# Altium PCB PCB1.PcbDoc
Units mil, origin at the board's own origin, x right, y up, seen from the top; angles counter-clockwise.
Board outline 4547.44 x 2454.85 mil, 2 copper layers (Top Layer, Bottom Layer); 40 components, 33 nets, 183 pads, 228 vias.
Unrouted connection lines stored in the file: 2.
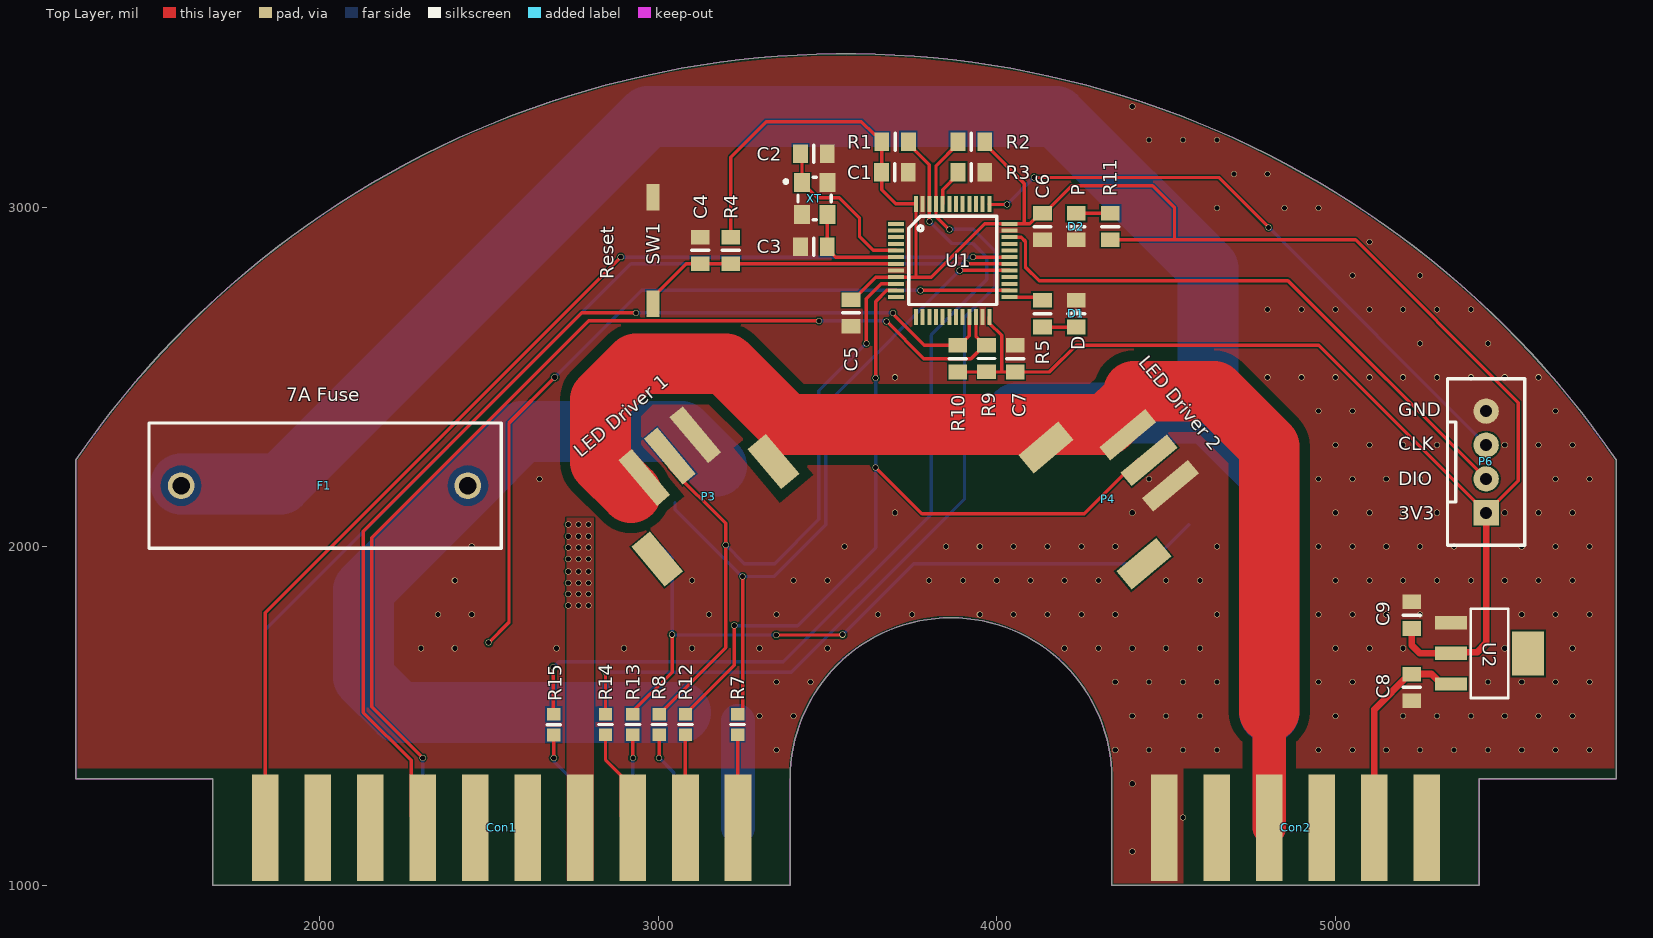
[diagram p0: Top Layer view]
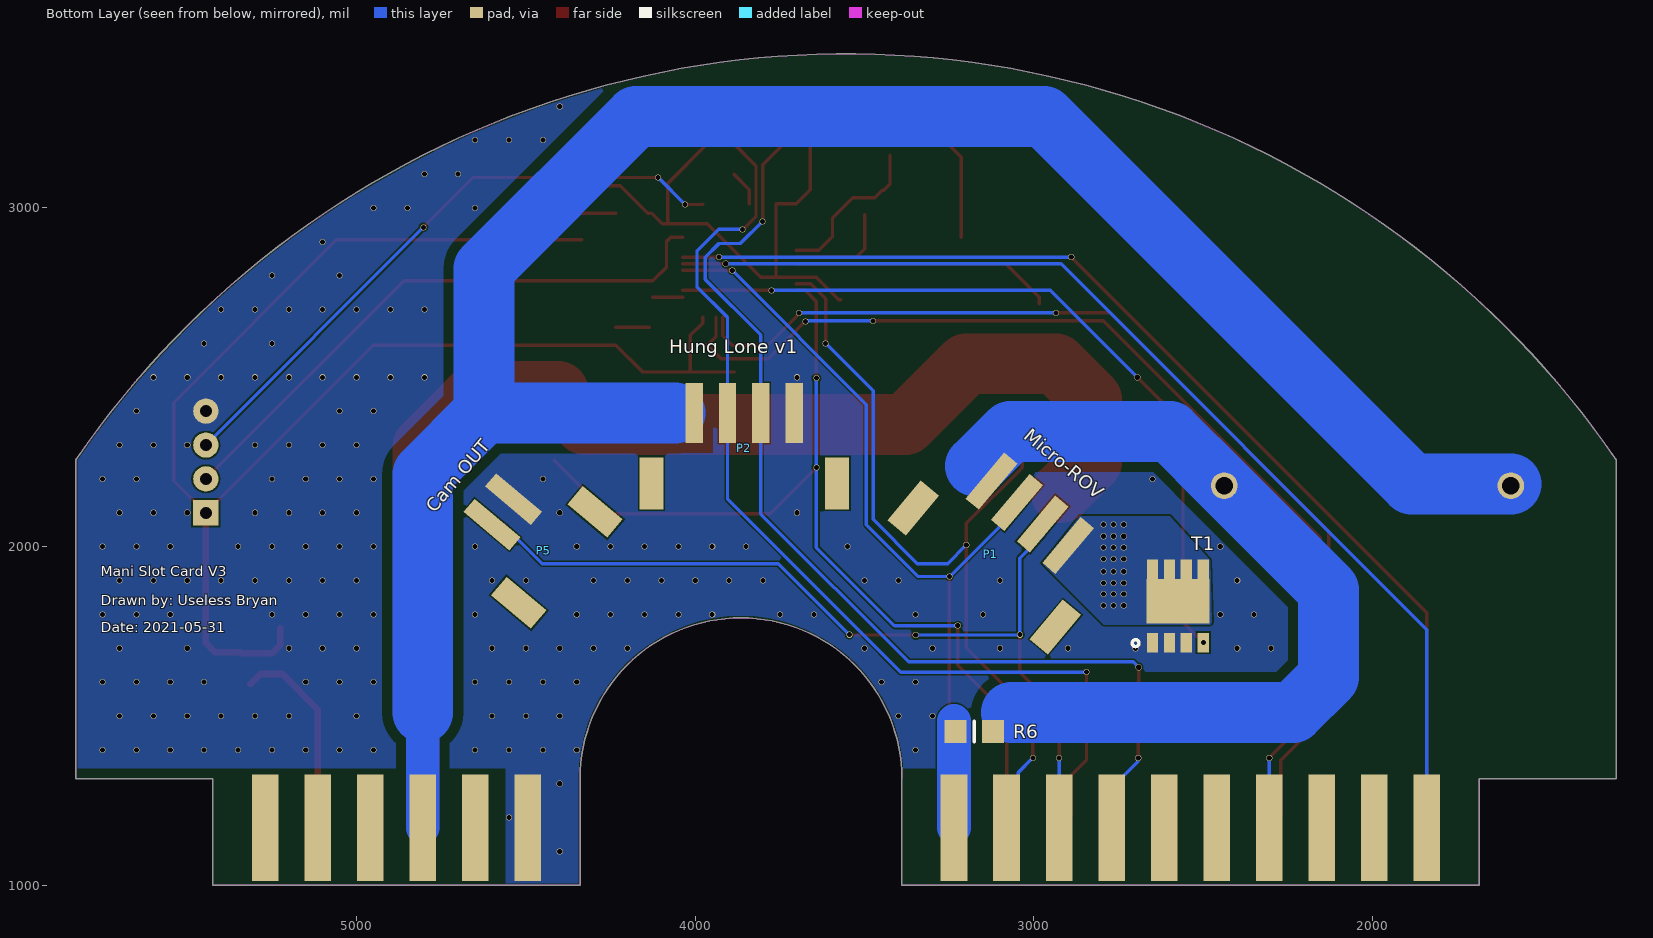
[diagram p1: Bottom Layer view, seen from below]
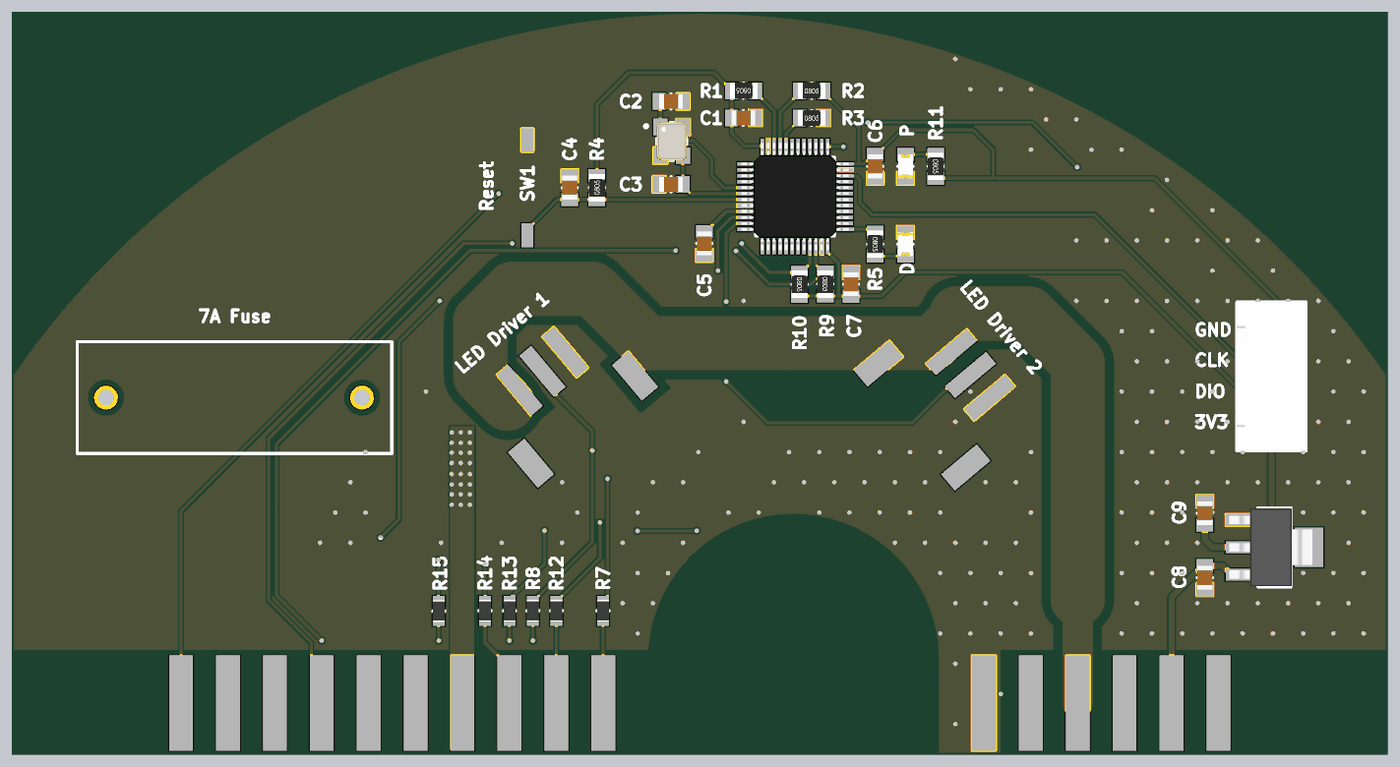
[diagram p2: 3D render of the assembled board from above, using the file's embedded part models]

## Layer stack, top to bottom
Top Solder: solder mask 0.4, Solder Resist, Dk 3.5
Top Layer: signal copper 1.4
Dielectric 1: dielectric 12.6, FR-4, Dk 4.8
Bottom Layer: signal copper 1.4
Bottom Solder: solder mask 0.4, Solder Resist, Dk 3.5

## Board outline
1281.3,1315 1281.3,2256.37 1281.27,2256.39 cw(c3555,699.09) 5828.71,2256.42 5828.7,2256.41 5828.7,1315 5425,1315 5425,1000 4340,1000 4340,1315 ccw(c3865,1315) 3865,1790 ccw(c3865,1315) 3390,1315 3390,1000 1685,1000 1685,1315

## Design rules (kind name [scope] priority, off if disabled: settings)
Clearance "Gold Finger" [InPadClass('Gold Finger')] p1: gap=5 ignorepadtopadclearanceinfootprint=FALSE except(10: SMDPad-Poly)
Clearance "Power Track" [InNetClass('Current')] p2: gap=20 ignorepadtopadclearanceinfootprint=TRUE except(10: Track-Track; 30: Track-SMDPad Track-Poly SMDPad-Poly Poly-Poly)
Clearance [All] p3: gap=5 ignorepadtopadclearanceinfootprint=FALSE except(10: SMDPad-Region)
PolygonConnect Current [InNetClass('Current')] p1: connectstyle=Direct reliefconductorwidth=10 reliefentries=4 polygonreliefangle="90 Angle" airgapwidth=10
PolygonConnect GND [InNetClass('GND')] p2: connectstyle=Direct reliefconductorwidth=10 reliefentries=4 polygonreliefangle="90 Angle" airgapwidth=10
PolygonConnect [All] p3: connectstyle=Relief reliefconductorwidth=10 reliefentries=4 polygonreliefangle="90 Angle" airgapwidth=10
RoutingVias [All] p1: holewidth=15 width=18 viastyle="Through Hole" minholewidth=14 minwidth=15 maxholewidth=28 maxwidth=50
SolderMaskExpansion [All] p1: expansion=4 istentingtop=FALSE
Width [All] p1: maxlimit=200 minlimit=10 preferedwidth=10
30 further rules are at their usual default settings.

## Classes and differential pairs
pad class "Gold Finger": Con2-2 Con2-4
net class GND: GND Micro_ROV_GND
net class Current: 12V Micro_ROV_12V

## Components (designator, comment, footprint, x,y, rotation, side; value= is the part's Value field where it differs from the comment)
C1 "100nF" C0805 3699.37,3105 r180 top locked
C2 "22pF" C0805 3460,3160 r180 top locked
C3 "22pF" C0805 3460,2885.79 r0 top locked
C4 "1uF" C0805 3125,2874.53 r270 top
C5 "100nF" C0805 3570,2690 r90 top locked
C6 "100nF" C0805 4135,2945 r90 top locked
C7 "100nF" C0805 4055,2555 r270 top locked
C8 "100nF" C0805 5225,1584.37 r90 top
C9 "100nF" C0805 5225,1797.64 r270 top
Con1 "2x10pin" 2x10pin 2538.03,1170 r0 top locked
Con2 "2x6pin" 2x6pin 4882.2,1170 r180 top locked
D1 "LED" LED-0805 4235,2687.68 r90 top locked
D2 "LED" LED-0805 4235,2945 r270 top locked
F1 "7A Fuse" FUSE-BLXA 2020,2179.96 r0 top
P1 "Micro-ROV" XH2.54-4PIN_SMD 3012.3,2098.37 r220 bottom
P2 "Hung Lone v1" XH2.54-4PIN_SMD 3855.47,2395 r180 bottom
P3 "LED Driver 1" XH2.54-3PIN_SMD 3035,2267.13 r40 top
P4 "LED Driver 2" XH2.54-3PIN_SMD 4450,2255 r310 top
P5 "Cam OUT" XH2.54-2PIN_SMD 4568.37,2102.7 r130 bottom
P6 "ST-Link" XH2.54-4PIN 5445,2250 r90 top
R1 "4.7k" R0805 3700,3195 r180 top locked
R2 "4.7k" R0805 3925,3195 r0 top locked
R3 "1k" R0805 3925,3105 r0 top locked
R4 "10k" R0805 3215,2874.53 r90 top
R5 "1k" R0805 4135,2687.68 r270 top locked
R6 "0" R1206 3176.23,1454.49 r180 bottom
R7 "0" R0603 3235,1475 r90 top
R8 "0" R0603 3003.39,1475 r90 top
R9 "4.7k" R0805 3970,2555.63 r270 top locked
R10 "4.7k" R0805 3885,2555 r270 top locked
R11 "1k" R0805 4335,2945 r270 top locked
R12 "0" R0603 3080.94,1475 r90 top
R13 "0" R0603 2925.83,1475 r90 top
R14 "0" R0603 2845,1475 r90 top
R15 "0" R0603 2692.23,1474.21 r90 top
SW1 "SW-PB" SWITCH-2PIN 2985,2874.53 r270 top
T1 "NMOS 2R6" TPH2R608NH 2575,1825 r180 bottom
U1 "STM32F103C8T6" LQFP48 3870,2845 r270 top locked
U2 "AMS1117" SOT-223 5455,1685 r0 top
XT "8MHz" 3225-P 3462.4,3027.76 r270 top locked

## Footprints (in the part's own frame and the unit in brackets; to place one, negate y for a bottom-side part, rotate by r counter-clockwise, add the part's x,y. Pads: shape width x height; smd on the part's side, far side on the other; paste and mask are expansions set on the pad)
2x6pin [mm]
  rect 2x8 smd: 1(-9.85,0) 2(-5.91,0) 3(-1.97,0) 4(1.97,0) 5(5.91,0) 6(9.85,0)
  rect 2x8 smd far side: 1(-9.85,0) 2(-5.91,0) 3(-1.97,0) 4(1.97,0) 5(5.91,0) 6(9.85,0)
2x10pin [mm]
  rect 2x8 smd far side: 1(17.73,0) 3(13.79,0) 5(9.85,0) 7(5.91,0) 9(1.97,0) 11(-1.97,0) 13(-5.91,0) 15(-9.85,0) 17(-13.79,0) 19(-17.73,0)
  rect 2x8 smd: 2(17.73,0) 4(13.79,0) 6(9.85,0) 8(5.91,0) 10(1.97,0) 12(-1.97,0) 14(-5.91,0) 16(-9.85,0) 18(-13.79,0) 20(-17.73,0)
3225-P [mm]
  rect 1.4x1.2 smd: 1(-1.2,-0.95) 2(-1.2,0.95) 2(1.2,-0.95) 3(1.2,0.95)
  silkscreen extent -1.6,-2.29 1.6,1.25, body extent -1.6,-1.25 1.6,1.25, height 0.61
C0805 [mm]
  rect 1.1x1.4 smd: 1(-1,0) 2(1,0)
  silkscreen extent 0,-0.64 0,0.64, body extent -1,-0.62 1,0.63, height 0.6
FUSE-BLXA [mm]
  round 2 hole 1.3: 1(-10.871,0) 2(10.629,0)
  silkscreen extent -13.28,-4.7 13.13,4.7
LED-0805 [mm]
  rect 1.1x1.4 smd: 1(-1,0) 2(1,0)
  silkscreen extent 0,-0.64 0.23,0.64, body extent -1,-0.62 1,0.63, height 0.81
LQFP48 [mm]
  rect 0.3x1.2 smd: 1(-2.75,-4.25) 2(-2.25,-4.25) 3(-1.75,-4.25) 4(-1.25,-4.25) 5(-0.75,-4.25) 6(-0.25,-4.25) 7(0.25,-4.25) 8(0.75,-4.25) 9(1.25,-4.25) 10(1.75,-4.25) 11(2.25,-4.25) 12(2.75,-4.25) 25(2.75,4.25) 26(2.25,4.25) 27(1.75,4.25) 28(1.25,4.25) 29(0.75,4.25) 30(0.25,4.25) 31(-0.25,4.25) 32(-0.75,4.25) 33(-1.25,4.25) 34(-1.75,4.25) 35(-2.25,4.25) 36(-2.75,4.25)
  rect 1.2x0.3 smd: 13(4.25,-2.75) 14(4.25,-2.25) 15(4.25,-1.75) 16(4.25,-1.25) 17(4.25,-0.75) 18(4.25,-0.25) 19(4.25,0.25) 20(4.25,0.75) 21(4.25,1.25) 22(4.25,1.75) 23(4.25,2.25) 24(4.25,2.75) 37(-4.25,2.75) 38(-4.25,2.25) 39(-4.25,1.75) 40(-4.25,1.25) 41(-4.25,0.75) 42(-4.25,0.25) 43(-4.25,-0.25) 44(-4.25,-0.75) 45(-4.25,-1.25) 46(-4.25,-1.75) 47(-4.25,-2.25) 48(-4.25,-2.75)
  silkscreen extent -3.3,-3.3 3.3,3.3, body extent -4.5,-4.5 4.5,4.5, height 1.47
R0603 [mm] "Chip Resistor, 2-Leads, Body 1.60x0.80mm, IPC Medium Density"
  rect 0.95x1 smd: 1(-0.775,0) 2(0.775,0)
  silkscreen extent 0,-0.51 0,0.51, body extent -0.9,-0.5 0.9,0.5, height 0.55
R0805 [mm]
  rect 1.1x1.4 smd: 1(-1,0) 2(1,0)
  silkscreen extent 0,-0.64 0,0.64, body extent -1.15,-0.67 1.15,0.68, height 0.76
R1206 [mil]
  rect 65x68 smd: 1(-55,0) 2(55,0)
  silkscreen extent 0,-30 0,30, body extent -63,-31 63,31, height 24
SOT-223 [mm]
  rect 2.4x1 smd: 1(-2.9,2.3) 2(-2.9,0) 3(-2.9,-2.3)
  rect 2.4x3.3 smd: 4(2.9,0)
  silkscreen extent -1.4,-3.35 1.4,3.35, body extent -3.81,-3.25 3.19,3.25, height 1.59
SWITCH-2PIN [mm]
  rect 2x1 smd: 1(-4,0) 2(4,0)
TPH2R608NH [mm]
  rect 0.85x1.45 smd: 1(-1.905,2.75) 1(-0.635,2.75) 1(0.635,2.75) 1(1.905,2.75) 2(1.905,-2.75) 3(-1.905,-2.75) 3(-0.635,-2.75) 3(0.635,-2.75)
  rect 4.7x3.35 smd: 1(0,0.35)
  silkscreen extent -3.43,-3.05 -2.92,-2.54, body extent -2.45,-3 2.45,3, height 1
XH2.54-2PIN_SMD [mm]
  rect 1.3x4.5 smd: 1(-1.25,0) 2(1.25,0)
  rect 1.8x3.9 smd: 3(-4.45,-5.3) 3(4.45,-5.3)
XH2.54-3PIN_SMD [mm]
  rect 1.3x4.5 smd: 1(-2.5,0) 2(0,0) 3(2.5,0)
  rect 1.8x3.9 smd: 4(-5.7,-5.3) 4(5.7,-5.3)
XH2.54-4PIN [mm]
  rect 1.9x1.9 hole 0.9: 1(-3.81,0)
  round 1.9 hole 0.9: 2(-1.27,0) 3(1.27,0) 4(3.81,0)
  silkscreen extent -6.25,-2.9 6.25,2.9, body extent -6.25,-2.9 6.25,2.9, height 7
XH2.54-4PIN_SMD [mm]
  rect 1.3x4.5 smd: 1(-3.75,0) 2(-1.25,0) 3(1.25,0) 4(3.75,0)
  rect 1.8x3.9 smd: 5(-6.95,-5.3) 5(6.95,-5.3)

## Part data
C1 C2 C3 C4 C5 C6 C7 C8 C9: library part Cap
F1: library part Fuse
P1 P2 P6: library part 4Pin
P3 P4: library part 3Pin
P5: library part 2Pin
R1 R2 R4: library part Resistor, "pull-up resistor"
R3 R5 R6 R7 R8 R9 R10 R11 R12 R13 R14 R15: library part Resistor
T1: library part MOSFET-N
XT: library part "Passive Crystal"

## Via types
v1: diameter 18, hole 15, Top Layer to Bottom Layer, tented both sides, 228 vias

## Nets (pads, with @x,y where several pads share a name; then routed paths per layer and width w, separated by ;. In a path a pad name is that pad's centre, name@x,y a point inside that pad or via, vN(x,y) a via of type N, cw(c..) or ccw(c..) an arc to the next point about the centre after c; other vN are vias at no path point)
3V3: C1.2 C5.2 C6.2 C7.2 C9.2 P6.1 R1.2 R2.2 R4.2 R9.2 R10.2 R11.2 U1.9 U1.24 U1.36 U1.48 U2.2 | length 7142
  Top Layer w10: R4.2 3215,3150 3320,3255 3600.63,3255 3638.07,3217.56 3643.98,3217.56 R1.2@3660.63,3200.91 ; C5.2 3575.91,2729.37 3642.32,2795.79 U1.9 3761.73,2795.79 ; R1.2 3660.63,3105 3660.63,3053.94 3702.24,3012.32 U1.48 3761.73,2795.79 ; R10.2 3970,2515.63 4014.41,2515.63 ; R2.2 3964.37,3189.09 4081.29,3072.18 4081.29,2953.27 ; U1.24 3978.27,2659.96 4014.41,2623.82 4014.41,2515.63 ; C6.2@4129.09,2984.37 4097.99,2953.27 4081.29,2953.27 ; C6.2 4140.91,2984.37 4221.54,3065 4460,3065 4525,3000 4525,2905.63 ; R11.2 4525,2905.63 ; 3761.73,2795.79 3806.89,2795.79 3964.37,2953.27 U1.36 4081.29,2953.27 ; 4014.41,2515.63 C7.2 4155.63,2515.63 4234.37,2594.37 4950.63,2594.37 P6.1 5540,2195 5540,2425 5059.37,2905.63 4525,2905.63
  Top Layer w20: C9.2 5225,1710 5250,1685 U2.2 5343.9,1688.07 5418.07,1688.07 5445,1715 P6.1
5V: C8.2 Con2.2 U2.3 | length 603.2
  Top Layer w20: Con2.2@5114.88,1170 5114.88,1519.53 5219.09,1623.74 C8.2 5283.98,1623.74 U2.3@5313.27,1594.45
12V: Con2.4 F1.1 P2.1 P3.1 P3.4@3341.03,2251.54 P4.1 P4.4@4145.91,2292.78 | length 9589
  Top Layer w100: Con2.4@4804.65,1170 4804.65,1513.19
  Top Layer w180: 2920,2160 2829.6,2250.4 2829.6,2434.56 2935.04,2540 3200,2540 3380,2360 4325,2360 4405,2440 ; 4405,2458.83 4641.17,2458.83 4804.65,2295.35 4804.65,1513.19
  Bottom Layer w100: Con2.4@4804.65,1170 4804.65,1509.65
  Bottom Layer w180: F1.1@1592,2185 1885,2185 2970,3270 4175,3270 4624.29,2820.71 4624.29,2395 ; 4060,2395 4624.29,2395 ; 4804.65,1509.65 4804.65,2214.65 4624.29,2395
Cam: P1.3 P5.1 R13.2 | length 2268.1
  Top Layer w10: R13.2@2916.89,1504.72 3041.73,1629.56 v1(3041.73,1740) ; v1(3348.94,1738.99) 3543.99,1738.99 v1(3545,1740)
  Bottom Layer w10: P1.3@2974.6,2033.14 3041.73,1966.02 v1(3041.73,1740) 3042.74,1738.99 v1(3348.94,1738.99) ; v1(3545,1740) 3755,1950 4451.41,1950 P5.1@4566.41,2065
GND: C1.1 C2.1 C3.1 C4.1 C5.1 C6.1 C7.1 C8.1 C9.1 Con2.6 D1.2 D2.2 P2.4 P3.3 P4.3 P5.2 P6.4 R3.2 SW1.1 T1.3 U1.8 U1.23 U1.35 U1.47 U2.1 XT.2
  other v1: 4400,1100 4550,1200 4400,1300 3350,1400 4350,1400 4450,1400 4550,1400 4650,1400 4950,1400 5050,1400 5150,1400 5250,1400 5350,1400 5450,1400 5550,1400 5650,1400 5750,1400 3300,1500 3400,1500 4400,1500 4500,1500 4600,1500 5000,1500 5200,1500 5300,1500 5400,1500 5500,1500 5600,1500 5700,1500 3350,1600 3450,1600 4350,1600 4450,1600 4550,1600 4650,1600 4950,1600 5050,1600 5150,1600 5450,1600 5550,1600 5650,1600 5750,1600 2300,1700 2400,1700 2700,1700 2900,1700 3100,1700 3300,1700 3500,1700 4200,1700 4300,1700 4400,1700 4500,1700 4600,1700 5000,1700 5100,1700 5200,1700 5500,1700 5700,1700 2350,1800 2450,1800 3150,1800 3350,1800 3650,1800 3750,1800 3950,1800 4050,1800 4150,1800 4250,1800 4350,1800 4650,1800 4950,1800 5050,1800 5150,1800 5250,1800 5550,1800 5650,1800 5750,1800 2400,1900 3100,1900 3400,1900 3500,1900 3800,1900 3900,1900 4000,1900 4100,1900 4200,1900 4300,1900 4500,1900 4600,1900 5000,1900 5100,1900 5200,1900 5300,1900 5400,1900 5500,1900 5600,1900 5700,1900 2450,2000 3550,2000 3850,2000 3950,2000 4050,2000 4150,2000 4250,2000 4350,2000 4650,2000 4950,2000 5050,2000 5150,2000 5250,2000 5350,2000 5550,2000 5650,2000 5750,2000 3700,2100 4400,2100 5000,2100 5100,2100 5200,2100 5300,2100 5500,2100 5600,2100 5700,2100 2650,2200 4450,2200 4950,2200 5050,2200 5150,2200 5250,2200 5650,2200 5750,2200 5000,2300 5100,2300 5200,2300 5300,2300 5500,2300 5600,2300 5700,2300 4950,2400 5050,2400 5650,2400 3700,2500 4800,2500 4900,2500 5000,2500 5100,2500 5200,2500 5300,2500 5400,2500 5500,2500 5600,2500 5250,2600 5450,2600 4800,2700 4900,2700 5000,2700 5100,2700 5200,2700 5300,2700 5400,2700 5050,2800 5250,2800 5100,2900 4650,3000 4850,3000 4950,3000 4700,3100 4800,3100 4450,3200 4550,3200 4650,3200 4400,3300
GPIO: T1.2 U1.26 | length 2312.6
  Top Layer w10: v1(2500,1716.73) 2560,1776.73 2560,2365.02 v1(2695,2500.02) ; v1(3775,2756.42) U1.26
  Bottom Layer w10: v1(2695,2500.02) 2951.4,2756.42 3095,2756.42 v1(3775,2756.42)
I2C1_SCL: P2.2 R2.1 R14.2 U1.45 | length 2622.7
  Top Layer w10: R14.2 v1(2845,1629.56) ; v1(3860.16,2936.9) 3858.06,2936.9 3820.79,2974.17 U1.45 3820.79,3124.25 R2.1@3885.63,3189.09
  Bottom Layer w10: v1(2845,1629.56) 3393.85,1629.56 3904.69,2140.4 P2.2 3904.69,2676.57 3995,2766.89 3995,2872.06 3930.16,2936.9 v1(3860.16,2936.9)
I2C1_SDA: P2.3 R1.1 R15.2 U1.46 | length 2733.8
  Top Layer w10: R15.2@2690.76,1506.19 v1(2690.76,1643.8) ; R1.1@3739.37,3189.09 3801.1,3127.36 U1.46 v1(3801.1,2960.52)
  Bottom Layer w10: v1(2690.76,1643.8) 2706.96,1660 3370,1660 3806.26,2096.26 P2.3 3806.26,2625 3970,2788.74 3970,2855 3930,2895 3866.63,2895 v1(3801.1,2960.52)
I2C2_SCL: Con1.14 R10.1 U1.21 | length 3107
  Top Layer w10: Con1.14 2270.98,1204.37 2270.98,1369.21 2130,1510.2 2130,2045 2775,2690 v1(2935,2690) ; v1(3694.21,2690) 3694.21,2685.71 3785.55,2594.37 R10.1 ; R10.1@3890.91,2594.37 3919.21,2622.68 U1.21
  Bottom Layer w10: v1(2935,2690) v1(3694.21,2690)
I2C2_SDA: Con1.13 R9.1 U1.22 | length 3036.3
  Top Layer w10: v1(2305.35,1376.35) 2155,1526.7 2155,2025.86 2795.72,2666.57 v1(3475,2666.57) ; v1(3675,2665) 3785,2555 3924.09,2555 R9.1@3964.09,2595 ; U1.22 3938.9,2620.2 R9.1@3964.09,2595 ; R9.1 R9.1@3964.09,2595
  Bottom Layer w10: Con1.13@2305.35,1288.11 v1(2305.35,1376.35) ; v1(3475,2666.57) 3671.26,2666.57 3672.84,2665 v1(3675,2665)
Micro_ROV_12V: F1.2 P1.1 R6.2 | length 2514.5
  Bottom Layer w180: 3065.71,1510 2235.44,1510 2130,1615.44 2130,1871.5 F1.2 2598.5,2340 3070,2340 3172.5,2237.5
Micro_ROV_GND: Con1.8 P1.4 T1.1
  other v1: 2735,1825.72 2765,1825.72 2795,1825.72 2735,1860 2765,1860 2795,1860 2735,1892.79 2765,1892.79 2795,1892.79 2735,1927.07 2765,1927.07 2795,1927.07 2735,1963.65 2765,1963.65 2795,1963.65 2735,1997.93 2765,1997.93 2795,1997.93 2735,2030.72 2765,2030.72 2795,2030.72 2735,2065 2765,2065 2795,2065
NetCon1_1: Con1.1 R6.1 | length 315
  Bottom Layer w100: Con1.1 R6.1@3236.06,1485
NetCon1_2: Con1.2 R7.1 | length 273.4
  Top Layer w10: Con1.2@3235,1171.06 R7.1
NetCon1_3: Con1.3 R8.1 | length 306.6
  Top Layer w10: v1(3003.39,1376.35) R8.1
  Bottom Layer w10: v1(3003.39,1376.35) 3046.57,1333.16 3046.57,1204.37 Con1.3
NetCon1_4: Con1.4 R12.1 | length 274.5
  Top Layer w10: Con1.4 R12.1
NetCon1_5: Con1.5 R13.1 | length 274.5
  Top Layer w10: v1(2925.83,1376.35) R13.1
  Bottom Layer w10: Con1.5 v1(2925.83,1376.35)
NetCon1_6: Con1.6 R14.1 | length 308
  Top Layer w10: R14.1 2845,1370 2891.46,1323.54 2891.46,1204.37 Con1.6
NetCon1_7: Con1.7 R15.1 | length 188.1
  Top Layer w10: v1(2692.23,1376.35) R15.1
  Bottom Layer w10: v1(2692.23,1376.35) 2693.76,1374.82 2693.76,1365.06 Con1.7@2770.71,1288.11
NetD1_1: D1.1 R5.2 | length 100
  Top Layer w10: R5.2 D1.1
NetD2_1: D2.1 R11.1 | length 100
  Top Layer w10: D2.1 R11.1
NetR3_1: R3.1 U1.44 | length 105.5
  Top Layer w10: U1.44 3840.47,3053.94 R3.1@3885.63,3099.09
NetR5_1: R5.1 U1.25 | length 88
  Top Layer w10: U1.25 R5.1@4125.31,2736.73
OSC_IN: C2.2 U1.5 XT.1 | length 475.9
  Top Layer w10: C2.2@3425,3155.63 XT.1 3425,3071.06 3443.62,3052.44 3447.56,3052.44 3470,3030 3535,3030 3595,2970 3595,2915 3635.47,2874.53 U1.5
OSC_OUT: C3.2 U1.6 XT.3 | length 313.9
  Top Layer w10: XT.3@3499.37,2980.08 C3.2 3499.37,2879.88 3524.41,2854.84 U1.6
Reset: C4.2 R4.1 SW1.2 U1.7 | length 778.1
  Top Layer w10: SW1.2 2985,2736.73 3083.43,2835.16 C4.2 R4.1 U1.7
SWCLK: P6.3 U1.37 | length 1827.5
  Top Layer w10: U1.37@3978.27,3010.91 3979.17,3010 v1(4030,3010) ; v1(4110,3090) 4655,3090 v1(4802.64,2942.36)
  Bottom Layer w10: v1(4030,3010) v1(4110,3090) ; v1(4802.64,2942.36) P6.3
SWDIO: P6.2 U1.34 | length 1747.8
  Top Layer w10: U1.34 4038.23,2912.99 4072.88,2912.99 4085,2900.87 4085,2825 4125,2785 4860,2785 P6.2
TIM1_CH1: P1.2 R7.2 U1.29 | length 2085.7
  Top Layer w10: R7.2 3250,1520.51 v1(3250,1911.73) ; v1(3890.91,2815.47) U1.29
  Bottom Layer w10: P1.2 3050,2110 v1@3248.27,1911.73 ; v1(3250,1911.73) v1@3248.27,1911.73 ; v1(3890.91,2815.47) 3495,2419.57 3495,2065 3341.73,1911.73 v1@3248.27,1911.73
TIM2_CH1: P3.2 R8.2 U1.10 | length 2078.1
  Top Layer w10: R8.2@3004.37,1505.51 3018.07,1519.21 3018.07,1520.2 3200,1702.13 v1(3200,2005) 3200,2068.54 3035,2233.54 P3.2 ; v1(3615,2600) 3615,2731.73 3659.37,2776.1 U1.10
  Bottom Layer w10: v1(3200,2005) 3255,1950 3344.49,1950 3475,2080.51 3475,2460 v1(3615,2600)
TIM2_CH2: P4.2 R12.2 U1.11 | length 2531.2
  Top Layer w10: R12.2 3081.93,1505.51 3095.63,1519.21 3095.63,1520.2 3225,1649.57 v1(3225,1766.95) ; v1(3642.32,2233.54) 3779.29,2096.57 4257.98,2096.57 P4.2@4416.41,2255 ; v1(3642.32,2497.34) 3642.32,2723.74 3675,2756.42 U1.11
  Bottom Layer w10: v1(3225,1766.95) 3411.95,1766.95 3642.32,1997.32 v1(3642.32,2233.54) v1(3642.32,2497.34)
USART1_RX: Con1.19 U1.30 | length 3229.8
  Top Layer w10: v1(3910,2835.16) U1.30
  Bottom Layer w10: Con1.19 1840,1755.04 2920.11,2835.16 2925,2835.16 v1(3910,2835.16)
USART1_TX: Con1.20 U1.31 | length 3267.1
  Top Layer w10: Con1.20 1840,1804.81 v1(2890.03,2854.84) ; v1(3930.16,2854.84) U1.31
  Bottom Layer w10: v1(2890.03,2854.84) v1(3930.16,2854.84)
pads on no net: Con1.9 Con1.10 Con1.11 Con1.12 Con1.15 Con1.16 Con1.17 Con1.18 Con2.1 Con2.3 Con2.5 P1.5 P2.5 P3.4@2997.22,1963.04 P4.4@4434.4,1948.97 P5.3 U1.1 U1.2 U1.3 U1.4 U1.12 U1.13 U1.14 U1.15 U1.16 U1.17 U1.18 U1.19 U1.20 U1.27 U1.28 U1.32 U1.33 U1.38 U1.39 U1.40 U1.41 U1.42 U1.43 U2.4

## Polygon pours and split planes (outlines as drawn)
GND on Top Layer "Top Layer-GND" (solid, remove dead copper, pour order 9): 4329.03,1345 1281.3,1345 1281.3,2256.37 cw(c3555.02,699.1) 5828.71,2256.42 5828.7,1345 4550,1345 4550,1000 4330,1000 4330,1315 ccw(c3865,1315) 3865,1780 ccw(c3865,1315)
Micro_ROV_GND on Top Layer "MICRO_ROV_GND_L01_P008" (solid, pour order 8): 2730,1015 2730,2085 2810,2085 2810,1015
Micro_ROV_GND on Bottom Layer "MICRO_ROV_GND_L02_P005" (solid, pour order 5): 2475,1775 2480,1770 2794.6,1770 2974.6,1950 2865,2090 2598.5,2090 2480,1960
GND on Bottom Layer "Bottom Layer-GND" (solid, remove dead copper, pour order 7): 4329.03,1345 1281.3,1345 1281.3,2256.37 cw(c3555.02,699.09) 5828.71,2256.42 5828.7,1345 4560,1345 4560,1000 4330,1000 4330,1315 ccw(c3865,1315) 3865,1780 ccw(c3865,1315)

## Keep-outs
Keep-Out Layer:
  the board outline again, w1

## Silkscreen, mask and mechanical layers (free items; w line width, h text height)
Top Overlay:
  text "P" at 4260,3036.68 h40 r90
  text "Reset" at 2870,2790 h40 r90
  text "D" at 4260,2580 h40 r90
  text "GND" at 5185,2385 h40
  text "CLK" at 5185,2285 h40
  text "DIO" at 5185,2181.41 h40
  text "3V3" at 5185,2080 h40
Bottom Overlay:
  text "Mani Slot Card V3" at 5755.83,1912.01 h30
  text "Drawn by: Useless Bryan" at 5755.83,1827 h30
  text "Date: 2021-05-31" at 5755.83,1747.01 h30